# Altium PCB PCB2.PcbDoc
Units mm, origin at the board's own origin, x right, y up, seen from the top; angles counter-clockwise.
Board outline 70 x 70.1 mm, 2 copper layers (Top Layer, Bottom Layer); 50 components, 60 nets, 315 pads, 0 vias.
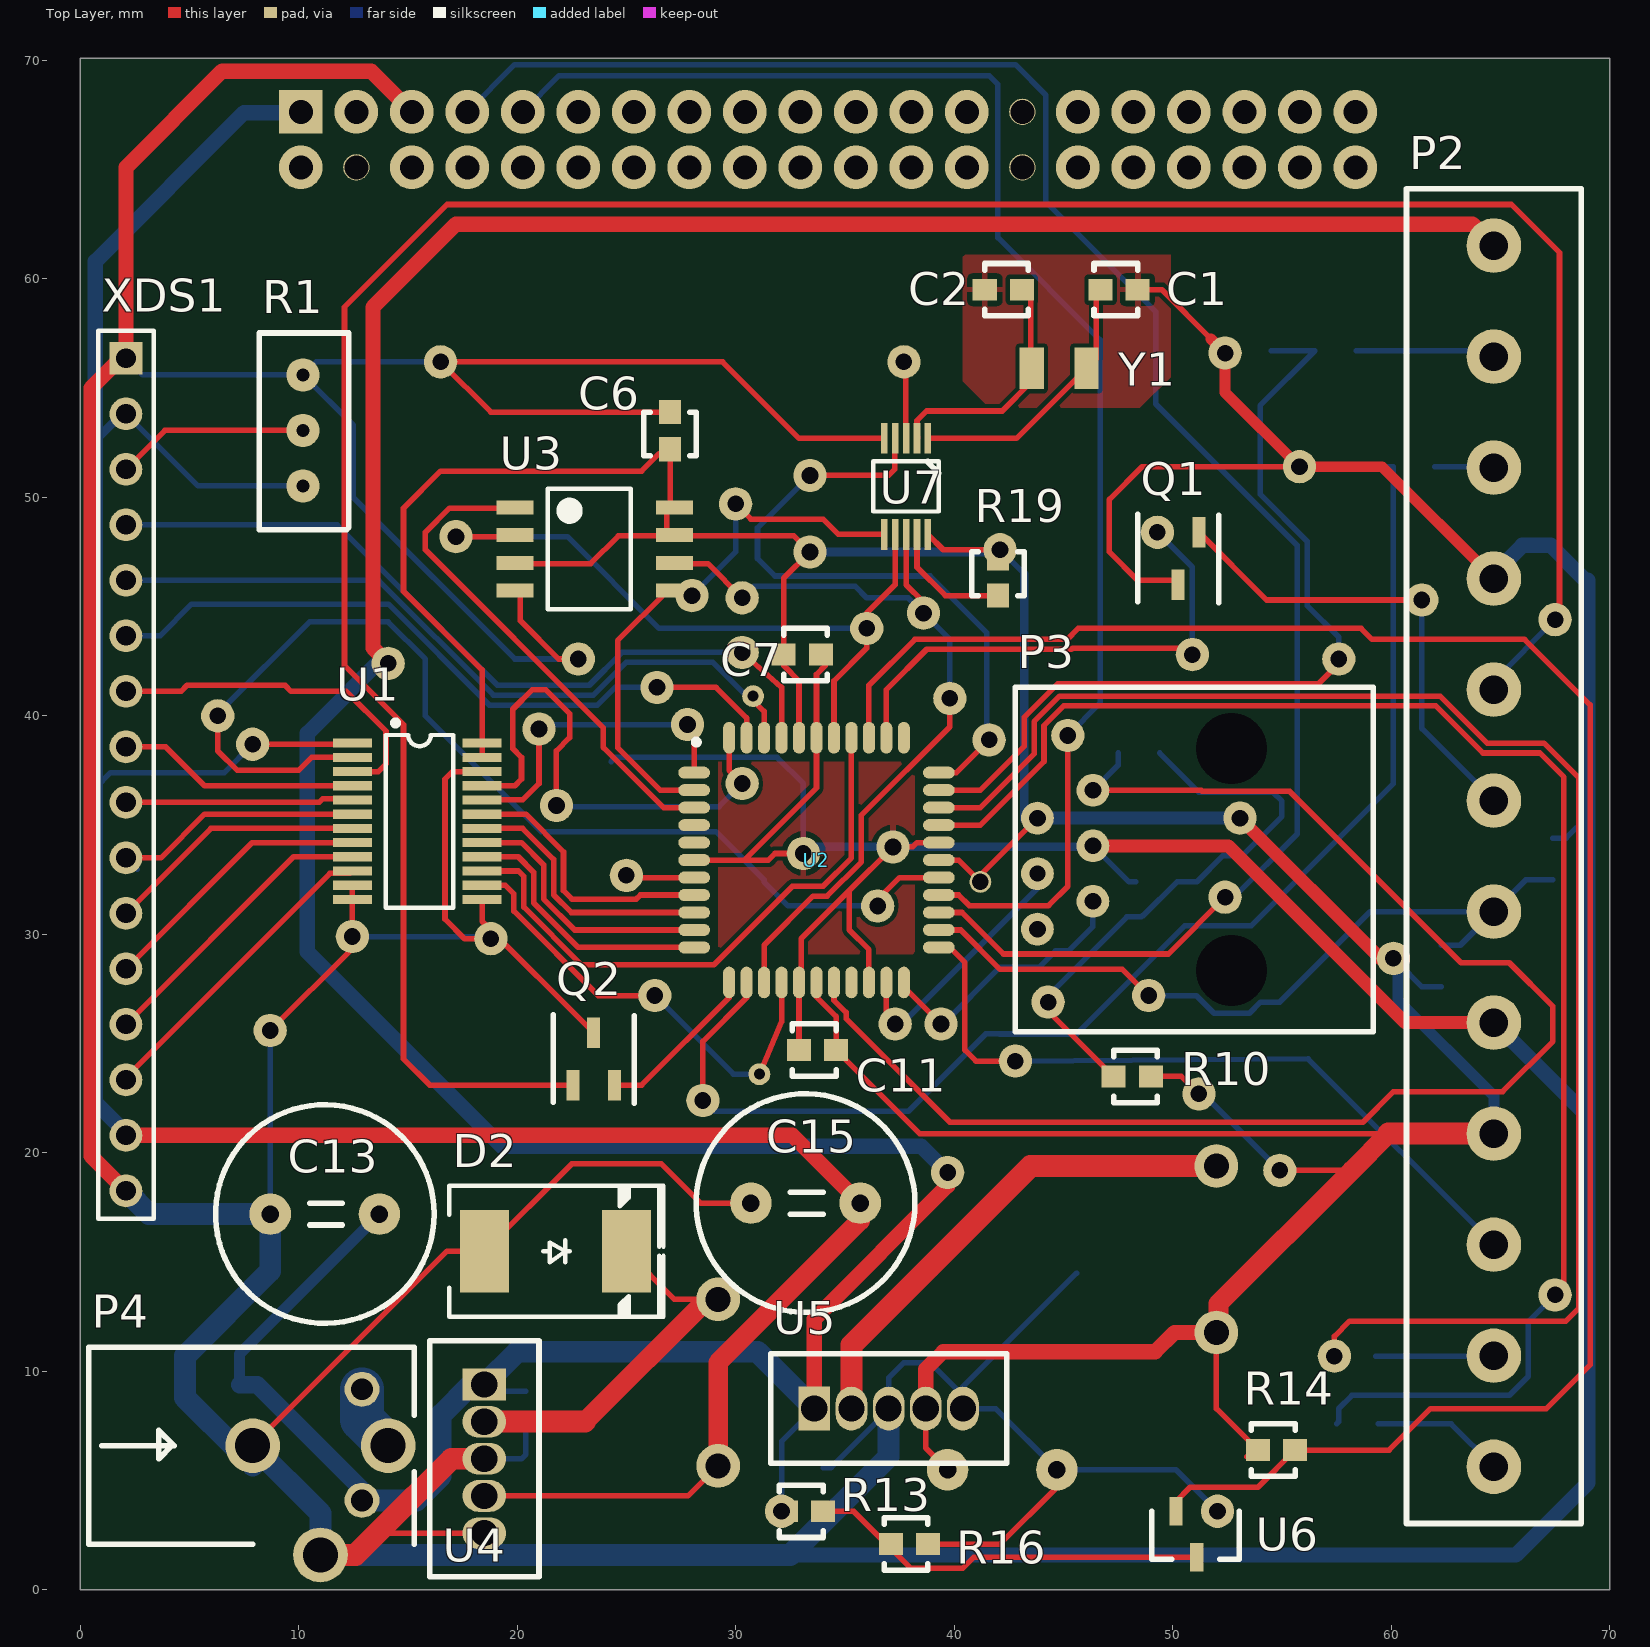
[diagram p0: Top Layer view]
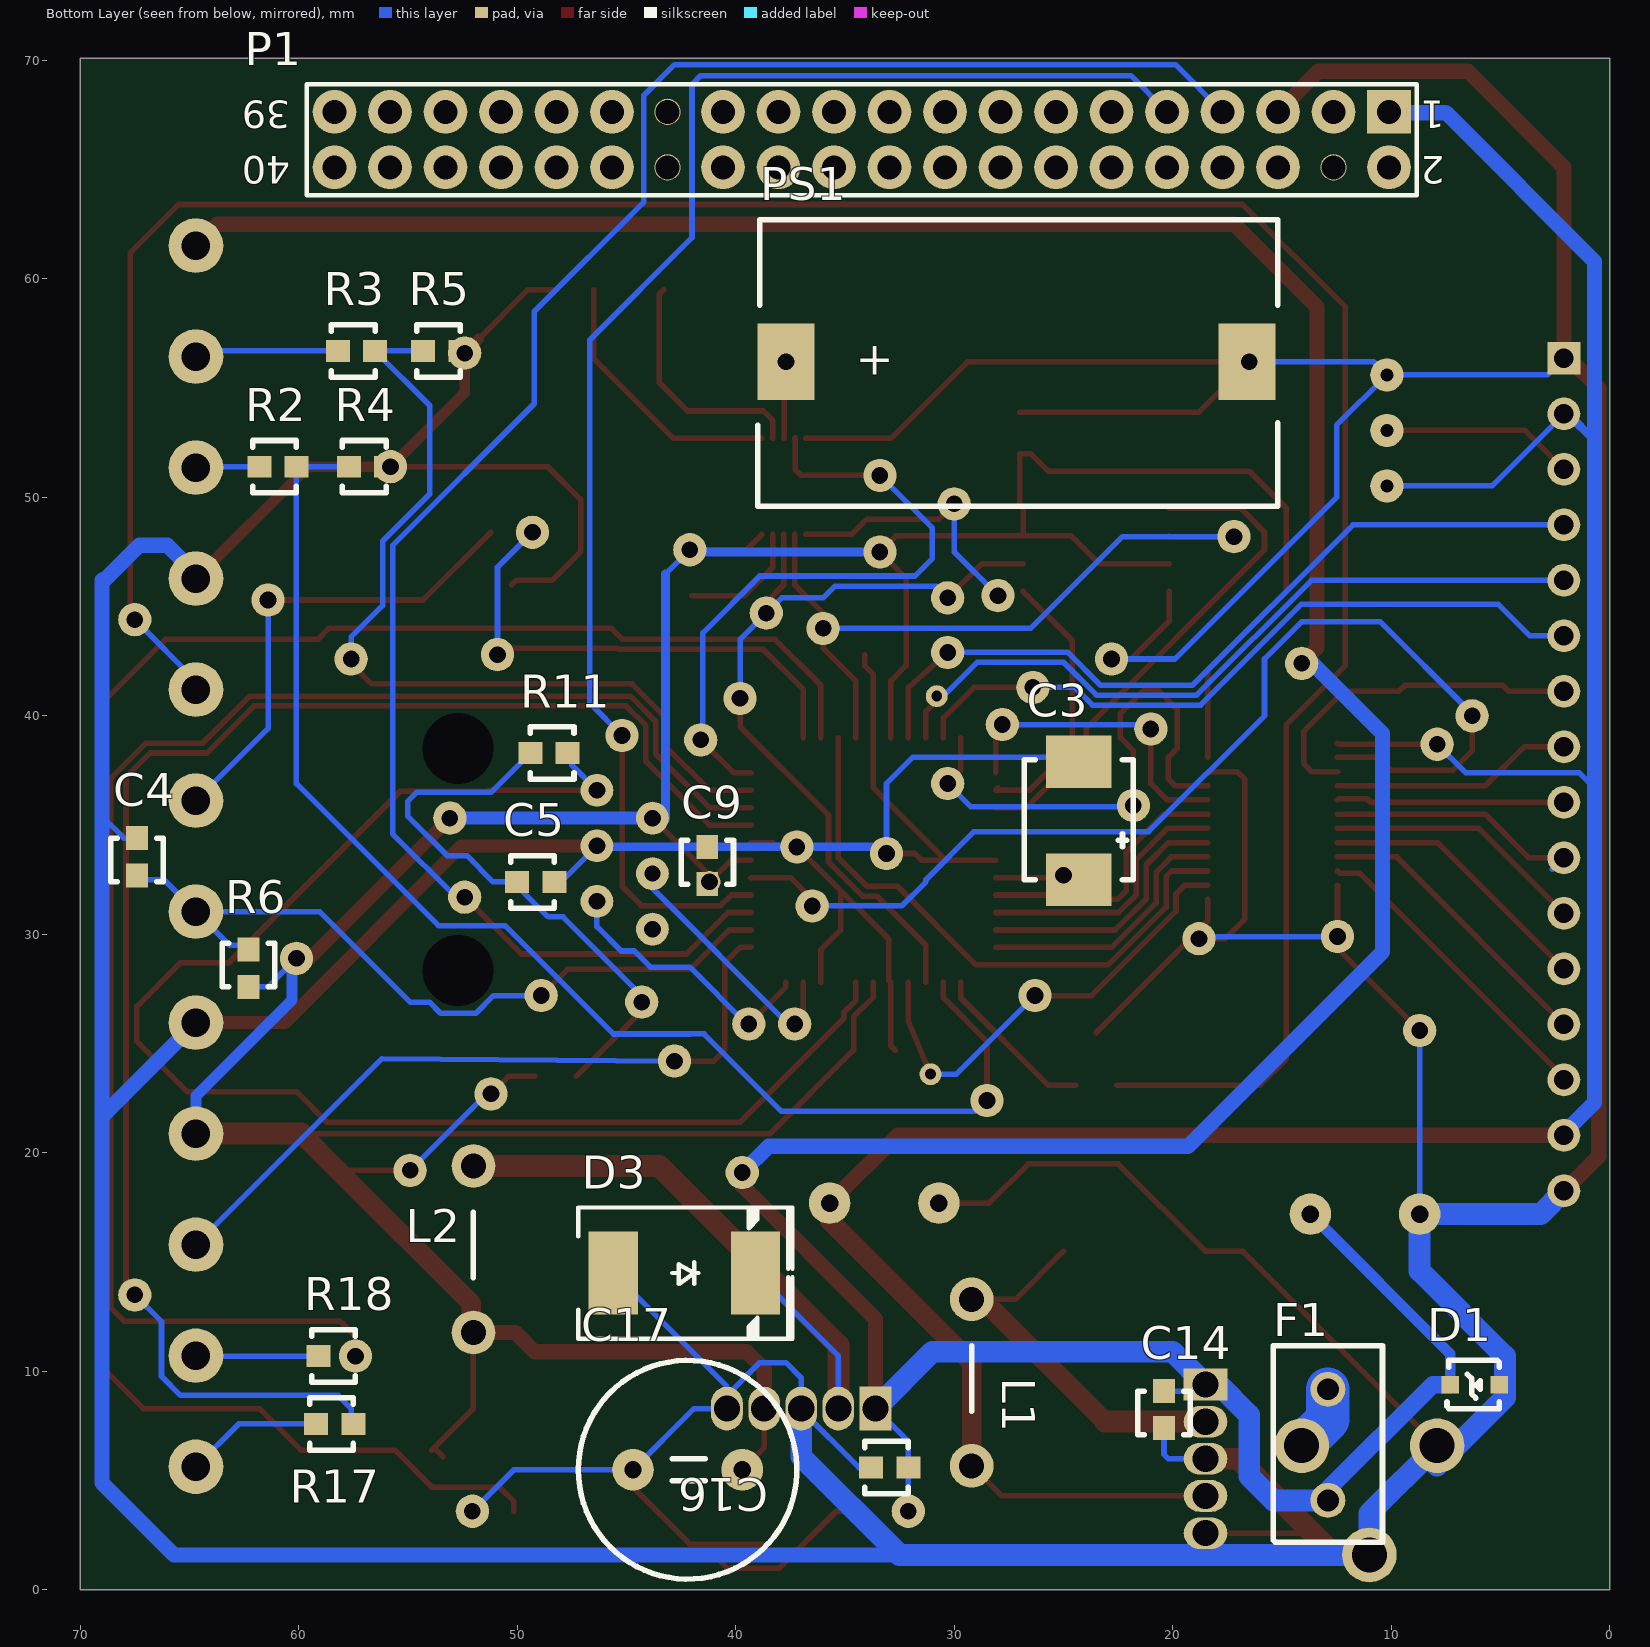
[diagram p1: Bottom Layer view, seen from below]

## Layer stack, top to bottom
Top Solder: solder mask 0.0102, Solder Resist, Dk 3.5
Top Layer: signal copper 0.0356
Dielectric 1: dielectric 0.32, FR-4, Dk 4.8
Bottom Layer: signal copper 0.0356
Bottom Solder: solder mask 0.0102, Solder Resist, Dk 3.5

## Board outline
0,0 70.002,0 70.002,70.1 0,70.1

## Design rules (kind name [scope] priority, off if disabled: settings)
Clearance [All] p1: gap=0.2 ignorepadtopadclearanceinfootprint=FALSE
ComponentClearance [All] p1: gap=0.254 collisioncheckmode=3 verticalgap=2540 showdistances=FALSE
HoleSize [All] p1: absolutevalues=TRUE maxlimit=7 minlimit=0.3 maxpercent=80.000 minpercent=20.000
PolygonConnect [All] p1: connectstyle=Relief reliefconductorwidth=0.254 reliefentries=4 polygonreliefangle="90 Angle" airgapwidth=0.254
RoutingVias [All] p1: holewidth=0.711 width=1.27 viastyle="Through Hole" minholewidth=0.3 minwidth=0.7 maxholewidth=1 maxwidth=1.27
SilkToSilkClearance [All] p1: silktosilkclearance=0
SilkToSolderMaskClearance [IsPad] p1: minsilkscreentomaskgap=0 clearancetoexposedcopper=TRUE
SolderMaskExpansion [All] p1: expansion=0.102
Width [All] p1: maxlimit=2 minlimit=0.2 preferedwidth=0.254
26 further rules are at their usual default settings.

## Classes and differential pairs
net class S_D[0..7]: S_D0 S_D1 S_D2 S_D3 S_D4 S_D5 S_D6 S_D7
net class RG_LED[0..1]: RG_LED0 RG_LED1
component class VRAIMENTHORSPCB: * B1 D4 DS1 MCL039PURGW P5
component class Power: C13 C14 C15 C16 C17 D1 D2 D3 F1 L1 L2 P4 PS1 R13 R14 R16 U4 U5 U6
component class PIC: C1 C2 C3 C4 C5 C6 C7 C9 C11 P3 R6 R10 R11 R19 U2 U3 U7 Y1
component class OTHER: P2 Q1 Q2 R2 R3 R4 R5 R17 R18
component class Ecran: R1 U1 XDS1

## Components (designator, comment, footprint, x,y, rotation, side; value= is the part's Value field where it differs from the comment)
C1 "18pF" 0603 48.4,59.5 r180 top
C2 "18pF" 0603 41.4,59.5 r0 top
C3 "10uF" C3 24.3,32.5 r90 bottom
C4 "100nF" 0603 67.4,34.4 r270 bottom
C5 "0.1uF" 0603 48.3,32.4 r0 bottom
C6 "22uF" 0603 27,53.9 r270 top
C7 "0.1uF" 0603 32.2,42.8 r0 top
C9 "0.1uF" 0603 41.3,32.3 r90 bottom
C11 "0.1uF" 0603 34.6,24.7 r180 top
C13 "1000uF" Condo_trav 8.7,17.2 r0 top
C14 "100uF" 0603 20.4,9.1 r270 bottom
C15 "1000uF" Condo_trav 30.7,17.7 r0 top
C16 "100uF" 0603 32.1,5.6 r0 bottom
C17 "1000uF" Condo_trav 44.7,5.5 r180 bottom
D1 "Diode 10TQ035" DiodeZin 5.05,9.4 r0 bottom
D2 "MBRS330T3G" "DO214AB SMC" 18.5,15.5 r0 top
D3 "MBRS330T3G" "DO214AB SMC" 45.6,14.5 r180 bottom
F1 "Fuse 1" FUSIBLE 12.9,9.18 r270 bottom
L1 "100uH" BOBINEDEMERDE_5v 29.2,5.68 r270 bottom
L2 "100uH" BOBINEDEMERDE_5v 52,11.78 r270 bottom
P1 "61304021121" Connect2x20 10.1,67.64 r0 bottom
P2 "31101112" Bornier12 64.7,5.64 r90 top
P3 "90512-001LF" RJ12 52.7,38.5 r270 top
P4 "FC681465P" JackAlim 7.9,6.6 r0 top
PS1 "Support Pile" Pile 37.7,56.2 r180 bottom
Q1 "MOSFET-N" nouveau_mosfetN 50.25,46 r180 top
Q2 "MOSFET-N" nouveau_mosfetN 23.5,25.5 r0 top
R1 "20k" POTARD 10.2,50.52 r90 top
R2 "300k" 0603 60.1,51.4 r0 bottom
R3 "300k" 0603 56.5,56.7 r0 bottom
R4 "100k" 0603 56,51.4 r0 bottom
R5 "100k" 0603 52.6,56.7 r0 bottom
R6 "330" 0603 62.3,27.6 r90 bottom
R10 "10K" 0603 47.3,23.5 r0 top value=10k
R11 "1Ko" 0603 49.4,38.3 r180 bottom value=1K
R13 "300k" 0603 34,3.6 r180 top
R14 "330" 0603 55.6,6.4 r180 top
R16 "100k" 0603 38.8,2.1 r180 top
R17 "60.4" 0603 57.5,7.6 r0 bottom value=60.4o
R18 "75" 0603 57.4,10.7 r0 bottom value=75o
R19 "330" 0603 42,45.5 r90 top
U1 "74LVX4245MTCX" TRANS 18.4,38.75 r270 top
U2 "PIC32MX110F016D-I/PT" TQFP-44_L 33.7,33.4 r0 top
U3 "SST25VF016B-50-4C-S2AF-T" FLASH 19.9,49.54 r0 top
U4 "LM2576HVT-5.0/NOPB" CONVERTTENSIONTEXAS 18.5,6 r270 top
U5 "LM2576T-3.3/NOPB" CONVERTTENSIONTEXAS 37,8.3 r0 top
U6 "LM809M3-3.08/NOPB" LM809 52.05,3.6 r270 top
U7 "MCP79510-I/MS" rtc 37.8,50.5 r270 top
XDS1 "1-826629-6" HDR1X16 2.1,56.36 r270 top
Y1 "32.768kHz" QUARTZ32KHz 44.8,55.9 r180 top

## Footprints (in the part's own frame and the unit in brackets; to place one, negate y for a bottom-side part, rotate by r counter-clockwise, add the part's x,y. Pads: shape width x height; smd on the part's side, far side on the other; paste and mask are expansions set on the pad)
0603 [mm] "Chip Inductor, Body 0.6x0.3mm, IPC High Density"
  rect 1.1x1 smd: 1(0,0) 2(1.7,0)
  silkscreen extent 0,-1.2 2,1.2
BOBINEDEMERDE_5v [mm]
  round 2 hole 1.143: 1(-7.62,0) 2(0,0)
  silkscreen extent -5.5,0 -2.5,0
Bornier12 [mm]
  round 2.5 hole 1.3: 1(0,0) 2(5.08,0) 3(10.16,0) 4(15.24,0) 5(20.32,0) 6(25.4,0) 7(30.48,0) 8(35.56,0) 9(40.64,0) 10(45.72,0) 11(50.8,0) 12(55.88,0)
  silkscreen extent -2.6,-4 58.48,4
C3 [mm]
  rect 2.4x3 smd: 1(0,0) 2(5.4,0)
  silkscreen extent 0,-2.5 5.5,2.5
Condo_trav [mm]
  round 1.9 hole 0.8: 1(0,0) 2(5,0)
  silkscreen extent -2.5,-5 7.5,5
Connect2x20 [mm] "Connector; Header; 20x2 Position"
  round 2 hole 1.1: 1(0,2.54) 3(2.54,0) 5(5.08,2.54) 6(5.08,0) 7(7.62,2.54) 8(7.62,0) 9(10.16,2.54) 10(10.16,0) 11(12.7,0) 12(12.7,2.54) 13(15.24,0) 14(15.24,2.54) 15(17.78,0) 16(17.78,2.54) 17(20.32,0) 18(20.32,2.54) 19(22.86,0) 20(22.86,2.54) 21(25.4,0) 22(25.4,2.54) 23(27.94,0) 24(27.94,2.54) 25(30.48,0) 26(30.48,2.54) 29(35.56,0) 30(35.56,2.54) 31(38.1,0) 32(38.1,2.54) 33(40.64,0) 34(40.64,2.54) 35(43.18,0) 36(43.18,2.54) 37(45.72,0) 38(45.72,2.54) 39(48.26,0) 40(48.26,2.54)
  rect 2x2 hole 1.1: 2(0,0)
  round 1.2 hole 1.1: 4(2.54,2.54) 27(33.02,0) 28(33.02,2.54)
  silkscreen extent -1.27,-1.27 49.53,3.81
CONVERTTENSIONTEXAS [mm] "Convertisseur de bordel de tension"
  rect 1.45x2 hole 1.2: 1(-3.4,0)
  oval 1.45x2 hole 1.2: 2(-1.7,0) 3(0,0) 4(1.7,0) 5(3.4,0)
  silkscreen extent -5.4,-2.5 5.4,2.5
DiodeZin [mm]
  rect 0.8x0.8 smd: 1(2.25,0) 3(0,0)
  silkscreen extent 0,-1.1 2.4,1.1
"DO214AB SMC" [mm] "Molded Diode, 2-Leads, Body 6.85x5.90mm, IPC Medium Density"
  rect 2.25x3.79 smd: 1(0,0) 2(6.5,0)
  silkscreen extent -1.6,-3 8.2,3
FLASH [mm] "8-Pin Plastic Medium Body Small Outline Package 1.27 mm Pitch, IPC Medium Density"
  rect 1.7x0.65 smd: 1(0,0) 2(0,-1.27) 3(0,-2.54) 4(0,-3.81) 5(7.3,-3.81) 6(7.3,-2.54) 7(7.3,-1.27) 8(7.3,0)
  silkscreen extent 1.5,-4.65 5.3,0.84
FUSIBLE [mm]
  round 1.6 hole 1: 1(0,0) 2(5.08,0)
  silkscreen extent -2,-2.5 7,2.5
HDR1X16 [mm] "Connector; Header; 16 Position"
  rect 1.5x1.5 hole 0.9: 1(0,0)
  round 1.5 hole 0.9: 2(2.54,0) 3(5.08,0) 4(7.62,0) 5(10.16,0) 6(12.7,0) 7(15.24,0) 8(17.78,0) 9(20.32,0) 10(22.86,0) 11(25.4,0) 12(27.94,0) 13(30.48,0) 14(33.02,0) 15(35.56,0) 16(38.1,0)
  silkscreen extent -1.27,-1.27 39.37,1.27
JackAlim [mm]
  round 2.5 hole 1.6: 1(6.2,0) 2(3.1,-5) 3(0,0)
  silkscreen extent -7.5,-4.5 7.4,4.5
LM809 [mm]
  rect 1.3x0.6 smd: 1(0,0) 2(0,-1.9) 3(2.1,-0.95)
  silkscreen extent 0,-3 2.2,1
nouveau_mosfetN [mm]
  rect 0.6x1.4 smd: 1(-0.95,-2.4) 2(0.95,-2.4) 3(0,0)
  silkscreen extent -1.85,-3.23 1.85,0.83
Pile [mm]
  rect 2.6x3.5 smd: 1(0,0) 2(21.1,0)
  silkscreen extent -1.3,-6.6 22.5,6.5
POTARD [mil]
  round 60 hole 23.62: 1(0,0) 2(100,0) 3(200,0)
  silkscreen extent -79,-83 276,79
QUARTZ32KHz [mm]
  rect 1.1x1.9 smd: 1(-1.25,0) 2(1.25,0)
RJ12 [mm]
  round 1.524 hole 3.25 unplated: 0(0,0) 0(10.16,0)
  round 1.5 hole 0.762: 1(1.91,-6.35) 2(3.18,-8.89) 3(4.45,-6.35) 5(6.99,-6.35) 6(8.26,-8.89)
  round 1.5 hole 0.72: 4(5.72,-8.89)
  silkscreen extent -2.8,-9.91 12.96,6.47
rtc [mm]
  rect 1.4x0.3 smd: 1(-2.2,1) 2(-2.2,0.5) 3(-2.2,0) 4(-2.2,-0.5) 5(-2.2,-1) 6(2.2,-1) 7(2.2,-0.5) 8(2.2,0) 9(2.2,0.5) 10(2.2,1)
  silkscreen extent -1.15,-1.5 1.15,1.5
TQFP-44_L [mm] "44-Pin Thin Quad Flat Pack 0.8 mm Pitch, 1.0/0.1 mm Lead Form, IPC High Density"
  oval 1.45x0.55 smd: 1(-5.6,4) 2(-5.6,3.2) 3(-5.6,2.4) 4(-5.6,1.6) 5(-5.6,0.8) 6(-5.6,0) 7(-5.6,-0.8) 8(-5.6,-1.6) 9(-5.6,-2.4) 10(-5.6,-3.2) 11(-5.6,-4) 23(5.6,-4) 24(5.6,-3.2) 25(5.6,-2.4) 26(5.6,-1.6) 27(5.6,-0.8) 28(5.6,0) 29(5.6,0.8) 30(5.6,1.6) 31(5.6,2.4) 32(5.6,3.2) 33(5.6,4)
  oval 0.55x1.45 smd: 12(-4,-5.6) 13(-3.2,-5.6) 14(-2.4,-5.6) 15(-1.6,-5.6) 16(-0.8,-5.6) 17(0,-5.6) 18(0.8,-5.6) 19(1.6,-5.6) 20(2.4,-5.6) 21(3.2,-5.6) 22(4,-5.6) 34(4,5.6) 35(3.2,5.6) 36(2.4,5.6) 37(1.6,5.6) 38(0.8,5.6) 39(0,5.6) 40(-0.8,5.6) 41(-1.6,5.6) 42(-2.4,5.6) 43(-3.2,5.6) 44(-4,5.6)
  silkscreen extent -5.62,5.28 -5.37,5.52
TRANS [mm] "Shrink Small Outline; 24 Leads; Body Width 4.4 mm; Pitch 0.65 mm"
  rect 0.42x1.78 smd: 1(0,-5.94) 2(0.65,-5.94) 3(1.3,-5.94) 4(1.95,-5.94) 5(2.6,-5.94) 6(3.25,-5.94) 7(3.9,-5.94) 8(4.55,-5.94) 9(5.2,-5.94) 10(5.85,-5.94) 11(6.5,-5.94) 12(7.15,-5.94) 13(7.15,0) 14(6.5,0) 15(5.85,0) 16(5.2,0) 17(4.55,0) 18(3.9,0) 19(3.25,0) 20(2.6,0) 21(1.95,0) 22(1.3,0) 23(0.65,0) 24(0,0)
  silkscreen extent -1.05,-4.42 7.53,-1.31

## Part data
C1 C2 C4 C5 C7 C9 C11 C13 C15 C17: library part Cap, "Capacitor", Fournisseur=Farnell
  C1 C2: Fabricant=AVX, Ref.Fabricant=02013A180JAT2A, Ref.Fournisseur=1740563
  C4: Fabricant="WURTH ELECTRONIK", Ref.Fabricant=885342211005, Ref.Fournisseur=2812613
  C5 C7 C9 C11: Fabricant=Multicomp, Ref.Fabricant=MCY4C3B104M160CT, Ref.Fournisseur=2310273
  C13 C15 C17: Fabricant=Multicomp, Ref.Fabricant=MCGLR16V108M10X16, Ref.Fournisseur=1902972
C3: library part "Cap Pol1", Fabricant=VISHAY, Fournisseur=Farnell, Ref.Fabricant=TL3C106K025C0450.., Ref.Fournisseur=2353238
C6: library part Cap, "Cout_Reg_3.3v", Fabricant=AVX, Fournisseur=Farnell, Ref.Fabricant=12103D226KAT2A, Ref.Fournisseur=1833829
C14 C16: library part Cap, "Cin_Reg_5v", Fabricant=CAHIER, Fournisseur=CAHIER, Ref.Fabricant=CAHIER, Ref.Fournisseur=CAHIER
D1: "Diode Zenner", Fabricant="ON SEMICONDUCTOR", Fournisseur=Farnell, Ref.Fabricant=MM3Z15VB, Ref.Fournisseur=2453991
D2 D3: library part "D Schottky", "Schottky Diode", Fabricant=OnSemiconductor, Fournisseur=Farnell, Ref.Fabricant=MBRS330T3G, Ref.Fournisseur=1459078
F1: "Fuse", Fabricant=Littelfuse, Fournisseur=Farnell, Ref.Fabricant=39515000000, Ref.Fournisseur=1596504
L1: library part Inductor, "L_Reg_5v", Fabricant="PULSE ELECTRONICS", Fournisseur=Farnell, Ref.Fabricant=PE92108KNL, Ref.Fournisseur=1209546
L2: library part Inductor, "L_Reg_3.3v", Fabricant="PULSE ELECTRONICS", Fournisseur=Farnell, Ref.Fabricant=PE92108KNL, Ref.Fournisseur=1209546
P1: library part "Header 20X2", "Header, 20-Pin, Dual row", Fabricant="WURTH ELECTRONIK", Fournisseur=Farnell, Ref.Fabricant=61304021121, Ref.Fournisseur=2356148
P2: library part "Header 12", "Header, 12-Pin", Fabricant="METZ CONNECT", Fournisseur=Farnell, Ref.Fabricant=31101112, Ref.Fournisseur=1909750
P3: library part "Header 6", "PortRJ12_debug", Fabricant="Amphenol ICC", Fournisseur=Farnell, Ref.Fabricant=90512-001LF, Ref.Fournisseur=1097914
P4: library part FC68148S, "Power connector", Fabricant=CLIFF, Fournisseur=Farnell, Ref.Fabricant=FC681465P, Ref.Fournisseur=1854512
PS1: library part SMTU-1225-1-LF, Fabricant=Renata, Fournisseur=Farnell, Ref.Fabricant=SMTU-1225-1-LF, Ref.Fournisseur=1216353
Q1 Q2: "N-Channel MOSFET", Fabricant=Nexperia, Fournisseur=Farnell, Ref.Fabricant=BUK7M42-60EX, Ref.Fournisseur=2760371
R1: library part RPot, "Potentiometer", Fabricant=VISHAY, Fournisseur=Farnell, Ref.Fabricant=M63S203KB40, Ref.Fournisseur=9609822
R2 R3 R4 R5 R6 R10 R11 R13 R14 R16 R17 R18 R19: library part Res2, "Resistor", Fournisseur=Farnell
  R2 R3 R13: Fabricant=MULTICOMP, Ref.Fabricant=MCSR08X3003FTL, Ref.Fournisseur=2074433
  R4 R5 R16: Fabricant=MULTICOMP, Ref.Fabricant=MCWR06X1003FTL, Ref.Fournisseur=2447226
  R6 R14 R19: Fabricant="TE Connectivity", Ref.Fabricant=RN73C1J232RBTDF, Ref.Fournisseur=2687973
  R10: Fabricant="TE CONNECTIVITY", Ref.Fabricant=CPF0201D10KC1, Ref.Fournisseur=2117887
  R11: Fabricant="TE CONNECTIVITY", Ref.Fabricant=CPF0201D1K0E1, Ref.Fournisseur=2117780
  R17: Fabricant="TE CONNECTIVITY", Ref.Fabricant=RP73PF1E60R4BTDF, Ref.Fournisseur=2838800
  R18: Fabricant="TE CONNECTIVITY", Ref.Fabricant=CPF0805B75RE1, Ref.Fournisseur=1697415
U1: "Bus Transceiver", Fabricant="ON SEMICONDUCTOR", Fournisseur=Farnell, Ref.Fabricant=74LVX4245MTCX, Ref.Fournisseur=1467357
U2: library part PIC32, Fabricant=MICROCHIP, Fournisseur=Farnell, Ref.Fabricant=PIC32MX110F016D-I/PT, Ref.Fournisseur=2057068
U3: library part Memoire, "FLASH", Fabricant=Microchip, Fournisseur=Farnell, Ref.Fabricant=SST25VF016B-50-4I-S2AF-T, Ref.Fournisseur=2774943
U4: library part LM2576-5V, "Regulateur de Tension 5V", Fabricant="TEXAS INSTRUMENTS", Fournisseur=Farnell, Ref.Fabricant=LM2576HVT-5.0/NOPB, Ref.Fournisseur=1469176
U5: library part LM2576-3.3V, "Regulateur de Tension 3.3V", Fabricant="TEXAS INSTRUMENTS", Fournisseur=Farnell, Ref.Fabricant=LM2576T-3.3/NOPB, Ref.Fournisseur=2382916
U6: "Voltage Monitor", Fabricant="TEXAS INSTRUMENTS", Fournisseur=Farnell, Ref.Fabricant=LM809M3-3.08/NOPB, Ref.Fournisseur=2352609
U7: library part MCP79510, "RTC", Fabricant=Microchip, Fournisseur=Farnell, Ref.Fabricant=MCP79510-I/MS, Ref.Fournisseur=2361124
XDS1: library part "Header 16", "Header, 16-Pin", Fabricant="AMP-TE CONNECTIVITY", Fournisseur=Farnell, Ref.Fabricant=1-826629-6, Ref.Fournisseur=1248124
Y1: library part XTAL, "Crystal Oscillator", Fabricant=ABRACON, Fournisseur=Farnell, Ref.Fabricant=ABS07-32.768KHZ-7-T, Ref.Fournisseur=1838935

## Free pads (board coordinates)
  round 1.524 hole 0.762: 2(32.1,3.6) 4(52.05,3.6) 6(33.1,33.7) 7(25,32.7) 10(41.6,38.9) 11(37.7,56.2) 12(42.1,47.6) 13(33.4,47.5) 14(38.6,44.7) 15(30.3,45.4) 16(17.2,48.2) 17(36,44) 18(22.8,42.6) 19(39.4,25.9) 20(37.3,25.9) 21(42.8,24.2) 24(45.2,39.1) 25(60.1,28.9) 26(53.08,35.32) 27(52.4,31.7) 28(48.9,27.2) 39(36.5,31.3) 40(27.8,39.6) 43(30.3,36.9) 46(30.3,42.9) 48(26.4,41.3) 49(67.5,13.5) 50(57.4,10.7) 51(33.4,51) 52(16.5,56.2) 53(28.5,22.4) 54(57.6,42.6) 55(55.8,51.4) 56(52.4,56.6) 57(39.7,19.1) 59(44.3,26.9) 60(51.2,22.7) 61(54.9,19.2) 63(30,49.7) 64(28,45.5) 65(50.9,42.8) 66(49.3,48.4) 67(61.4,45.3) 69(67.5,44.4) 70(39.8,40.8) 71(37.2,34) 73(7.9,38.7) 74(8.7,25.6) 75(21,39.4) 76(21.8,35.9) 77(14.1,42.4) 78(26.3,27.2) 79(12.46,29.9) 80(18.8,29.8) 82(6.3,40)
  round 1 hole 0.762: 5(41.2,32.4)
  round 1 hole 0.5: 33(31.085,23.6) 47(30.8,40.9)

## Nets (pads, with @x,y where several pads share a name; then routed paths per layer and width w, separated by ;. In a path a pad name is that pad's centre, name@x,y a point inside that pad or via, vN(x,y) a via of type N, cw(c..) or ccw(c..) an arc to the next point about the centre after c; other vN are vias at no path point)
3.3VDC: C6.2 C7.1 C9.1 C11.1 C17.2 L2.2 P2.4 P3.2 pad.5 pad.12 pad.13 pad.25 pad.26 pad.60 pad.61 R6.1 R10.2 R14.2 R19.2 U1.23 U1.24 U2.17 U2.28 U2.40 U3.3 U3.7 U3.8 U5.4 U7.10 | length 200
  Top Layer w0.254: U1.23 U1.24 18.4,42.1 14.8,45.7 14.8,49.5 16.5,51.2 25.7,51.2 26.5,52 27,52 27,49.655 26.85,49.505 U3.7@26.85,48.235 ; U3.3@20.15,46.965 23.365,46.965 24.635,48.235 U3.7@26.85,48.235 ; U2.40 32.9,41.6 32.2,42.3 C7.1 32.2,46.3 pad.13 32.665,48.235 U3.7@26.85,48.235 ; U2.17 33.7,27.141 34.6,26.241 C11.1 38.42,20.88 59.88,20.88 ; U5.4 38.7,6.5 C17.2 ; U7.10 39.5,47.6 pad.12 ; U2.28 40.2,33.4 pad.5 41.2,32.71 P3.2 ; R10.2@49.2,23.5 50.4,23.5 pad.60 ; L2.2@52.1,11.88 L2.2 52,8.3 R14.2 ; R14.2@53.4,6.1 R14.2@53.7,6.4 ; pad.61 58.2,19.2 ; pad.25@59.5,28.9 pad.25
  Top Layer w0.6: pad.26 pad.25@59.5,28.9
  Top Layer w0.7: U5.4 38.7,10.1 39.5,10.9 49.2,10.9 50.08,11.78 L2.2
  Top Layer w0.9: L2.2@52.1,11.88 52.1,13.1 58.2,19.2 59.88,20.88
  Top Layer w1: 59.88,20.88 P2.4
  Bottom Layer w0.254: pad.12@42,47.5 pad.12 43.21,46.49 ; pad.60 51.4,22.7 pad.61 ; pad.25 60.3,28.7 61.4,27.6 R6.1
  Bottom Layer w0.4: pad.13 pad.12@42,47.5 ; P3.2@43.21,35.28 43.21,46.49
  Bottom Layer w0.5: pad.25@60.3,28.7 60.3,27 64.7,22.6 P2.4
  Bottom Layer w0.6: P3.2 pad.26
5VDC: C15.2 L1.2 P1.2 pad.73 R1.1 U1.1 U4.4 XDS1.2 XDS1.15 | length 137.7
  Top Layer w0.254: pad.73 12.41,38.7 U1.1 ; U4.4 27.82,4.3 L1.2 ; C15.2@35.7,16.9 C15.2
  Top Layer w0.7: XDS1.15 32.6,20.8 C15.2
  Top Layer w0.9: L1.2 29.2,10.4 C15.2@35.7,16.9
  Bottom Layer w0.254: 0.7,36.7 1.4,37.4 6.6,37.4 pad.73 ; XDS1.2@1.92,53.82 XDS1.2 5.4,50.52 R1.1 ; XDS1.15 XDS1.15@2.1,20.9 ; P1.2@10.06,67.6 P1.2
  Bottom Layer w0.4: 0.7,52.6 XDS1.2@1.92,53.82
  Bottom Layer w0.7: XDS1.15@2.1,20.9 0.7,22.3 0.7,36.7 0.7,52.6 0.7,60.8 7.5,67.6 P1.2@10.06,67.6
12VDC: C13.2 C14.1 C16.1 D1.1 F1.2 P2.12 pad.2 pad.57 pad.77 R13.2 U4.1 U5.1 | length 183.9
  Top Layer w0.7: pad.77 13.4,43.1 13.4,58.7 17.2,62.5 63.72,62.5 P2.12 ; U5.1 33.6,12.4 39.7,18.5 pad.57@39.7,19.4
  Bottom Layer w0.254: U4.1@17.9,9.4 U4.1 18.8,9.1 C14.1 ; pad.2 C16.1 32.1,6.8 U5.1
  Bottom Layer w0.5: D1.1 7.3,10.8 C13.2
  Bottom Layer w0.7: pad.77@13.8,42.6 10.4,39.2 10.4,29.2 19.3,20.3 38.5,20.3 pad.57
  Bottom Layer w0.8: D1.1 8.1,9.4 12.9,4.6 F1.2
  Bottom Layer w1: F1.2 15.4,4.1 16.5,5.2 16.5,8 U4.1@17.9,9.4 ; U4.1 20,10.9 31,10.9 U5.1
Cmd_servo: P2.3 pad.21 U2.23 | length 33.4
  Top Layer w0.254: U2.23 39.8,29.4 40.492,28.708 40.492,24.708 41,24.2 pad.21
  Bottom Layer w0.254: pad.21 56.2,24.3 P2.3
CR_DATA0_3V: pad.53 R2.1 R4.2 U2.13 | length 61.2
  Top Layer w0.254: pad.53 28.5,25.1 30.5,27.1 U2.13
  Bottom Layer w0.254: pad.53@28.3,22.6 pad.53 29,21.9 37.9,21.9 41.446,25.446 42.088,25.446 42.094,25.44 45.6,25.44 50.56,30.4 53.6,30.4 60.1,36.9 R2.1 R4.2@57.9,51.4
CR_DATA0_12V: P2.10 R2.2 | length 2.7
  Bottom Layer w0.254: R2.2@62,51.4 64.66,51.4 P2.10
CR_DATA1_3V: pad.54 R3.1 R5.2 U2.32 | length 40.3
  Top Layer w0.254: U2.32 41.2,36.6 43.203,38.603 43.203,39.927 44.738,41.462 56.662,41.462 57.6,42.4 pad.54
  Bottom Layer w0.254: R5.2@54.5,56.7 R3.1 54,54.2 54,50.142 56.154,47.988 56.154,45.046 57.6,43.6 pad.54
CR_DATA1_12V: P2.11 R3.2 | length 6.4
  Bottom Layer w0.254: R3.2@58.4,56.7 64.44,56.7 P2.11
CR_LED_G: Q2.2 U2.12 | length 7.6
  Top Layer w0.254: Q2.2 25.7,23.1 29.7,27.1 U2.12
CR_LED_G_CTRL: P2.8 pad.69 Q2.1 | length 123.6
  Top Layer w0.254: Q2.1 16,23.1 14.8,24.3 14.8,39.6 12.1,42.3 12.1,58.7 16.8,63.4 65.5,63.4 67.7,61.2 pad.69@67.7,44.2
  Bottom Layer w0.254: P2.8 64.7,41.6 pad.69
CR_LED_R: pad.65 pad.66 Q1.2 U2.35 | length 23.4
  Top Layer w0.254: U2.35 36.9,41.2 38.746,43.046 45.363,43.046 45.417,43.1 50.6,43.1 pad.65
  Bottom Layer w0.254: pad.66 50.9,46.8 pad.65
CR_LED_R_CTRL: P2.7 pad.67 Q1.1 | length 22
  Top Layer w0.254: Q1.1 54.3,45.3 pad.67
  Bottom Layer w0.254: pad.67 61.4,39.42 P2.7
FLSH_CE: U2.3 U3.1 | length 23.3
  Top Layer w0.254: U3.1@20.15,49.505 16.905,49.505 15.8,48.4 15.8,47.6 23.95,39.45 23.95,38.55 26.7,35.8 U2.3
GND: C1.1 C2.1 C3.2 C4.1 C5.1 C6.1 C7.2 C9.2 C11.2 C13.1 C14.2 C15.1 C16.2 C17.1 D1.3 D2.1 D3.1 P1.6 P2.5 P2.9 P3.3 P4.2 P4.3 pad.4 pad.6 pad.18 pad.52 pad.55 pad.56 pad.71 pad.74 pad.79 pad.80 PS1.2 Q1.3 Q2.3 R1.3 R4.1 R5.1 R16.1 U1.11 U1.12 U1.13 U1.22 U2.6 U2.16 U2.20 U2.29 U2.39 U3.4 U4.3 U4.5 U5.3 U5.5 U6.1 U7.5 XDS1.1 XDS1.16 | length 538.4
  Top Layer w0.254: XDS1.1@1.86,56.36 XDS1.1 ; P4.3 16.8,15.5 D2.1 22.5,19.5 26.6,19.5 28.4,17.7 C15.1 ; pad.74 12.46,29.36 pad.79 U1.12 U1.11 ; 13.7,2.7 13.8,2.6 U4.5 ; U1.13 18.4,30.6 Q2.3 ; U1.22 17.05,37.45 16.7,37.1 16.7,30.7 17.6,29.8 pad.80 ; U3.4@20.15,45.695 20.15,44.35 21.9,42.6 pad.18 ; C6.1 18.8,53.9 pad.52 29.4,56.2 32.9,52.7 U7.5 ; U2.6 30.4,33.4 ; C11.2@32.7,24.7 32.9,24.9 U2.16 33,27.9 33,29.8 35.2,32 ; pad.6 31.8,33.7 31.5,33.4 30.4,33.4 ; C7.2@34.1,42.8 34.1,42.3 33.7,41.9 U2.39 33.7,36.7 30.4,33.4 ; U2.20 36.1,29.3 35.2,30.2 35.2,32 ; R16.1 42.1,2.1 44.7,4.7 C17.1 ; U2.29 38.3,34.2 38.1,34 pad.71 35.2,32 ; C1.1 49.5,59.5 51.76,57.24 ; Q1.3 50.05,46.2 48.4,46.2 47.1,47.5 47.1,49.9 48.6,51.4 pad.55
  Top Layer w0.5: 51.76,57.24 pad.56 52.4,54.8 pad.55 59.58,51.4 P2.9
  Top Layer w0.6: P3.3 52.55,34.05 60.64,25.96 P2.5
  Top Layer w0.7: XDS1.1@1.86,56.36 0.5,55 0.5,19.86 XDS1.16 ; XDS1.1 2.1,65.1 6.5,69.5 13.32,69.5 P1.6
  Top Layer w1: P4.2 12.6,1.6 13.7,2.7 17,6 U4.3
  Bottom Layer w0.254: XDS1.1 2.86,55.6 R1.3 ; P4.3@7.275,6.325 7.55,6.6 P4.3 ; C13.1 pad.74 ; pad.79 18.7,29.9 pad.80 ; PS1.2 pad.52 10.8,56.2 R1.3 ; U4.3 20.2,6 20.4,6.2 C14.2@20.4,7.2 ; pad.18 19.9,42.6 12.5,50 12.5,53.3 R1.3 ; C3.2 24.5,38.1 31.9,38.1 33.1,36.9 pad.6 pad.6@33.41,34.01 ; C16.2@34,5.6 34.363,5.6 37,8.237 U5.3 37,9.7 37.7,10.4 38.9,10.4 U5.5@40.4,8.9 ; D3.1 40.4,9.3 U5.5@40.4,8.9 ; P3.3 48,32.4 C5.1 ; pad.4@51.65,3.2 pad.4 50.15,5.5 C17.1 41.9,8.3 U5.5 U5.5@40.4,8.9 ; P2.9 P2.9@64.7,46.5 ; C4.1 68,34.4 69,35.4 ; 68.9,46.2 69,46.2
  Bottom Layer w0.4: pad.6@33.41,34.01 41.3,34.01 P3.3@45.75,34.01
  Bottom Layer w0.7: 32.5,1.6 65.7,1.6 69,4.9 69,21.66 ; P2.5 69,21.66 ; P2.9@64.7,46.5 66,47.8 67.3,47.8 68.9,46.2 ; 69,46.2 69,35.4 69,21.66
  Bottom Layer w1: XDS1.16 3.16,17.2 C13.1 8.7,14.6 4.8,10.7 4.8,8.8 7.275,6.325 7.45,6.15 P4.3@7.9,5.7 ; P4.3 11,3.5 P4.2 32.5,1.6 37,6.1 U5.3@37,8.237
MCLR: P3.1 R11.2 U2.18 | length 66.7
  Top Layer w0.254: U2.18 34.5,26.983 35.054,26.429 35.054,26.146 39.8,21.4 58.7,21.4 60.1,22.8 65.1,22.8 67.4,25.1 67.4,26.7 65.4,28.7 63.2,28.7 55.352,36.548 51.352,36.548 51.31,36.59 P3.1
  Bottom Layer w0.254: P3.1 47.5,37.74 R11.2@47.5,38.3
NetC3_1: C3.1 pad.7 U2.7 | length 3.1
  Top Layer w0.254: pad.7 25.6,32.6 U2.7
NetC5_2: C5.2 pad.59 R10.1 R11.1 | length 26.2
  Top Layer w0.254: pad.59 44.3,26.5 R10.1
  Bottom Layer w0.254: pad.59@44.15,27.05 47.9,30.8 48.558,30.8 48.612,30.854 48.654,30.854 50.2,32.4 51.1,32.4 52.3,33.6 53.2,33.6 55,35.4 55,36.1 54.6,36.5 51.2,36.5 R11.1
NetD2_2: D2.2 L1.1 U4.2 | length 17.6
  Top Layer w0.254: D2.2 27.2,13.3 28.7,13.3 L1.1
  Top Layer w0.9: 23.1,7.7 L1.1@28.7,13.3
  Top Layer w1: U4.2 23.1,7.7
NetD3_2: D3.2 L2.1 U5.2 | length 30.8
  Top Layer w1: U5.2 35.3,11.2 43.5,19.4 L2.1
  Bottom Layer w0.254: U5.2 35.3,10.7 D3.2
NetF1_1: F1.1 P4.1 | length 3.1
  Bottom Layer w1: F1.1 F1.1@12.9,9.2
  Bottom Layer w2: F1.1 12.9,7.8 P4.1
NetP2_1: P2.1 R17.2 | length 6.1
  Bottom Layer w0.254: R17.2@59.4,7.6 62.74,7.6 P2.1
NetP2_2: P2.2 R18.2 | length 5.4
  Bottom Layer w0.254: R18.2@59.3,10.7 64.68,10.7 P2.2
NetR19_1: R19.1 U7.9 | length 5.7
  Top Layer w0.254: U7.9 38.3,46.8 39.6,45.5 R19.1
PGEC1: P3.5 pad.19 U2.22 | length 12.6
  Top Layer w0.254: U2.22 37.7,27.6 pad.19
  Bottom Layer w0.254: pad.19 39.5,25.9 42.1,28.5 43.9,28.5 44.637,29.237 45.237,29.237 46.35,30.35 P3.5
PGED1: P3.4 pad.20 U2.21 | length 11.8
  Top Layer w0.254: U2.21 36.9,26.3 pad.20
  Bottom Layer w0.254: pad.20 37.6,25.9 43.81,32.11 P3.4
PIC_RASPI_RXD: P1.8 pad.27 U2.25 | length 86
  Top Layer w0.254: U2.25 40.358,31 42.258,29.1 49.8,29.1 pad.27
  Bottom Layer w0.254: P1.8 19.88,69.8 42.8,69.8 44.2,68.4 44.2,63.52 49.22,58.5 49.22,54.28 55.7,47.8 55.7,34.6 52.8,31.7 pad.27
PIC_RASPI_TXD: P1.10 pad.24 U2.26 | length 68.3
  Top Layer w0.254: U2.26 40.2,31.8 40.689,31.311 43.358,31.311 43.364,31.317 44.317,31.317 45.2,32.2 pad.24
  Bottom Layer w0.254: P1.10 21.92,69.3 41.6,69.3 42,68.9 42,61.88 46.68,57.2 46.68,40.58 pad.24
Pot_contraste: R1.2 XDS1.3 | length 8.8
  Top Layer w0.254: XDS1.3 3.88,53.06 R1.2
PowerOK: R14.1 U2.36 U6.2 | length 90.1
  Top Layer w0.254: U2.36 36.1,41.4 38.2,43.5 45.175,43.5 45.675,44 58.625,44 59.125,43.5 66.1,43.5 69.1,40.5 69.1,10.3 67.1,8.3 61.8,8.3 59.9,6.4 R14.1 53.9,4.7 50.8,4.7 50.15,4.05 U6.2
RG_LED0: pad.49 R17.1 U2.30 | length 71.1
  Top Layer w0.254: U2.30 41.2,35 44.111,37.911 44.111,39.551 45.012,40.452 62.048,40.452 64.2,38.3 66.8,38.3 67.9,37.2 pad.49@67.9,13.5
  Bottom Layer w0.254: R17.1 57.6,7.7 57.6,8.302 58.198,8.9 65.4,8.9 66.277,9.777 66.277,12.277 pad.49
RG_LED1: pad.50 R18.1 U2.31 | length 70.7
  Top Layer w0.254: U2.31 41.2,35.8 43.657,38.257 43.657,39.739 44.824,40.906 62.236,40.906 64.388,38.754 66.988,38.754 68.589,37.153 68.589,12.9 67.989,12.3 58.1,12.3 57.4,11.6 pad.50
RTC_CS: pad.10 pad.51 U2.33 U7.4 | length 30
  Top Layer w0.254: pad.51 37,51 37.277,51.277 37.277,52.723 U7.4 ; U2.33 40.1,37.4 pad.10
  Bottom Layer w0.254: pad.51 31,48.6 31,47.2 31.8,46.4 38.9,46.4 41.5,43.8 41.5,39 pad.10
S_D0: pad.43 pad.76 U1.21 U2.44 | length 25
  Top Layer w0.254: U1.21 19.9,36.8 20.2,37.1 20.2,38.1 19.8,38.5 19.8,40.3 20.7,41.2 21.3,41.2 22.4,40.1 22.4,39 21.8,38.4 pad.76 ; U2.44 29.7,37.5 pad.43
  Bottom Layer w0.254: pad.76@21.354,35.846 29.246,35.846 pad.43 pad.43@30.3,36.775
S_D1: pad.40 pad.75 U1.20 U2.1 | length 14.8
  Top Layer w0.254: U1.20 20.25,36.15 21,36.9 pad.75 ; pad.40 28.1,39.3 U2.1
  Bottom Layer w0.254: pad.75@20.7,39.6 pad.40
S_D2: U1.19 U2.8 | length 12.4
  Top Layer w0.254: U1.19 20.4,35.5 22.122,33.778 22.122,32 22.511,31.611 25.451,31.611 25.64,31.8 U2.8
S_D3: U1.18 U2.9 | length 12.3
  Top Layer w0.254: U1.18 20.25,34.85 21.668,33.432 21.668,31.812 22.48,31 U2.9 U2.9@28.057,30.957
S_D4: U1.17 U2.10 | length 12.3
  Top Layer w0.254: U1.17 20.2,34.2 21.214,33.186 21.214,31.624 22.638,30.2 U2.10
S_D5: U1.16 U2.11 | length 12.2
  Top Layer w0.254: U1.16 20.05,33.55 20.76,32.84 20.76,31.436 22.796,29.4 U2.11
S_D6: U1.15 U2.37 | length 27
  Top Layer w0.254: U1.15 20.058,32.9 20.306,32.652 20.306,31.248 22.954,28.6 28.997,28.6 32.597,32.2 34,32.2 35.3,33.5 U2.37
S_D7: pad.33 pad.78 U1.14 U2.15 | length 21.1
  Top Layer w0.254: U1.14 19.45,32.25 19.852,31.848 19.852,31.06 23.712,27.2 pad.78 ; pad.33 32.1,26 U2.15
  Bottom Layer w0.254: pad.78 29.9,23.6 pad.33
S_E: pad.48 U2.43 XDS1.6 | length 32.8
  Top Layer w0.254: pad.48 29.1,41.3 30.5,39.9 U2.43
  Bottom Layer w0.254: XDS1.6@2.14,43.7 XDS1.6 3.66,43.66 5.108,45.108 14.108,45.108 18.724,40.492 23.676,40.492 24.484,41.3 pad.48
S_RS: pad.46 U2.41 XDS1.4 | length 36.6
  Top Layer w0.254: pad.46 32.1,41.3 U2.41
  Bottom Layer w0.254: XDS1.4 11.76,48.74 19.1,41.4 23.3,41.4 24.8,42.9 pad.46
S_RW: pad.47 U2.42 XDS1.5 | length 34.2
  Top Layer w0.254: pad.47 30.8,40.7 31.3,40.2 U2.42
  Bottom Layer w0.254: XDS1.5 13.658,46.2 18.912,40.946 23.488,40.946 24.988,42.446 28.954,42.446 30.5,40.9 pad.47
SPI_SCK: pad.14 pad.15 pad.70 U2.14 U3.6 U7.8 | length 38.6
  Top Layer w0.254: U3.6@26.85,46.965 28.735,46.965 pad.15 ; U2.14 31.3,29.5 33.546,31.746 34.188,31.746 35.754,33.312 35.754,35.454 39.8,39.5 pad.70 ; U7.8 37.8,46 38.6,45.2 pad.14 pad.14@38.3,44.7
  Bottom Layer w0.254: pad.15 30.825,45.925 35.475,45.925 36,45.4 37.9,45.4 pad.14 39.8,43.5 pad.70
SPI_SI: pad.16 pad.17 U2.38 U3.2 U7.7 | length 34
  Top Layer w0.254: pad.16 20.115,48.2 U3.2@20.15,48.235 ; U2.38 34.5,41.6 36,43.1 pad.17 36,44.7 37.3,46 U7.7
  Bottom Layer w0.254: pad.16 22.3,48.2 26.5,44 pad.17
SPI_SO: pad.63 pad.64 U2.2 U3.5 U7.6 | length 24.9
  Top Layer w0.254: U3.5@26.85,45.695 24.6,43.445 24.6,38.542 26.542,36.6 U2.2 U2.2@28,36.7 ; pad.63 30.7,49 34,49 34.7,48.3 U7.6
  Bottom Layer w0.254: pad.64 30,47.5 pad.63
STATUS_BTN: C4.2 P2.6 pad.28 R6.2 U2.24 | length 35.2
  Top Layer w0.254: U2.24 40.3,30.2 42.1,28.4 47.7,28.4 pad.28
  Bottom Layer w0.254: pad.28 51.079,27.2 51.891,26.388 53.509,26.388 54.021,26.9 54.9,26.9 59.04,31.04 P2.6 ; R6.2@62.3,29.5 63.16,29.5 P2.6 ; C4.2@67.4,32.5 66.16,32.5 P2.6
TS_D0: U1.3 XDS1.7 | length 16.1
  Top Layer w0.254: XDS1.7 4.62,41.12 4.9,41.4 9.38,41.4 9.66,41.12 12.18,41.12 14,39.3 14,37.8 13.65,37.45 U1.3
TS_D1: U1.4 XDS1.8 | length 11.1
  Top Layer w0.254: XDS1.8 3.92,38.58 5.7,36.8 U1.4
TS_D2: U1.5 XDS1.9 | length 10.4
  Top Layer w0.254: XDS1.9 10.94,36.04 11.1,36.2 12.41,36.2 U1.5
TS_D3: U1.6 XDS1.10 | length 11.9
  Top Layer w0.254: XDS1.10 3.7,33.5 5.7,35.5 U1.6
  Bottom Layer w0.254: XDS1.10 XDS1.10@2.625,32.975
TS_D4: U1.7 XDS1.11 | length 12
  Top Layer w0.254: XDS1.11 5.99,34.85 U1.7
TS_D5: U1.8 XDS1.12 | length 12.8
  Top Layer w0.254: XDS1.12 7.88,34.2 U1.8
TS_D6: U1.9 XDS1.13 | length 13.5
  Top Layer w0.254: XDS1.13 9.77,33.55 U1.9
TS_D7: U1.10 XDS1.14 | length 14.4
  Top Layer w0.254: XDS1.14 2.1,23.452 11.435,32.787 12.347,32.787 U1.10
TS_TR: pad.39 pad.82 U1.2 U2.27 | length 50.5
  Top Layer w0.254: pad.82 6.3,38.4 7.2,37.5 10,37.5 10.6,38.1 U1.2 ; pad.39 36.5,31.6 37.5,32.6 U2.27
  Bottom Layer w0.254: pad.82@6.5,40.3 10.5,44.3 14.1,44.3 15.8,42.6 15.8,40 21.1,34.7 29.1,34.7 31.3,32.5 31.3,32.4 32.4,31.3 pad.39
U6_Vcc: R13.1 R16.2 U6.3 | length 18.4
  Top Layer w0.254: R13.1 35.4,3.6 38,1 40.4,1 40.9,1.5 U6.3
Vbat: pad.11 PS1.1 U7.3 | length 3.5
  Top Layer w0.254: pad.11 37.777,56.123 37.777,52.723 U7.3
X1: C1.2 U7.1 Y1.1 | length 12.4
  Top Layer w0.254: U7.1 42.85,52.7 Y1.1 46.5,56.35 C1.2@46.5,59.5
X2: C2.2 U7.2 Y1.2 | length 11.1
  Top Layer w0.254: U7.2@38.323,52.723 U7.2 38.3,53.512 38.738,53.95 42.2,53.95 43.5,55.25 43.5,59.3 C2.2@43.3,59.5
pads on no net: P1.1 P1.3 P1.4 P1.5 P1.7 P1.9 P1.11 P1.12 P1.13 P1.14 P1.15 P1.16 P1.17 P1.18 P1.19 P1.20 P1.21 P1.22 P1.23 P1.24 P1.25 P1.26 P1.27 P1.28 P1.29 P1.30 P1.31 P1.32 P1.33 P1.34 P1.35 P1.36 P1.37 P1.38 P1.39 P1.40 P3.0 P3.6 U2.4 U2.5 U2.19 U2.34

## Polygon pours and split planes (outlines as drawn)
GND on Top Layer "HeatsinkConvert" (solid, pour order 6): 29.2,37.9 29.2,29.1 38.1,29.1 38.2,29.2 38.2,37.9
GND on Top Layer "HeatsinkConvert" (solid, pour order 4): 40.5,61.1 40.4,61 40.4,55.3 41.6,54.1 48.5,54.1 49.9,55.5 49.9,61.1

## Text inside footprints (layer, text, board x,y; h text height)
P1: Bottom Overlay "1" at 7.56,68.148 h1.27 r180; Bottom Overlay "2" at 7.56,65.608 h1.27 r180; Bottom Overlay "40" at 60.392,65.608 h1.27 r180; Bottom Overlay "39" at 60.392,68.148 h1.27 r180
PS1: Bottom Overlay "+" at 34.5,55.6 h1.52